# Altium PCB PCB.PcbDoc (part 1 of 2)
Units mm, origin at the board's own origin, x right, y up, seen from the top; angles counter-clockwise.
Board outline 40 x 90 mm, 4 copper layers (Top Layer, Int1 (GND), Int2, Bottom Layer (GND)), stack 0.77 mm thick; 131 components, 93 nets, 436 pads, 796 vias.
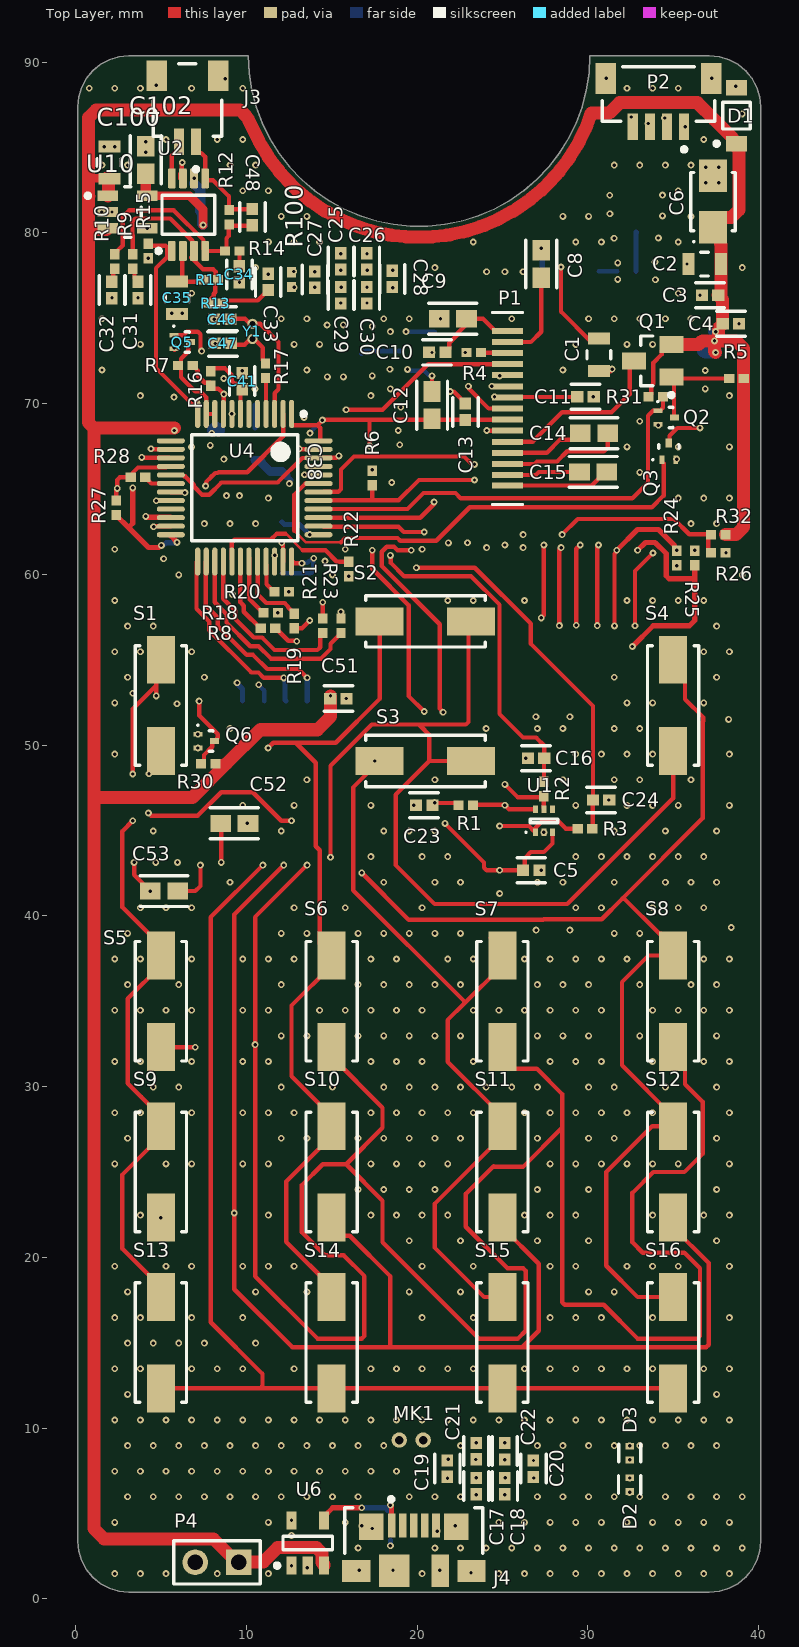
[diagram p0: Top Layer view]
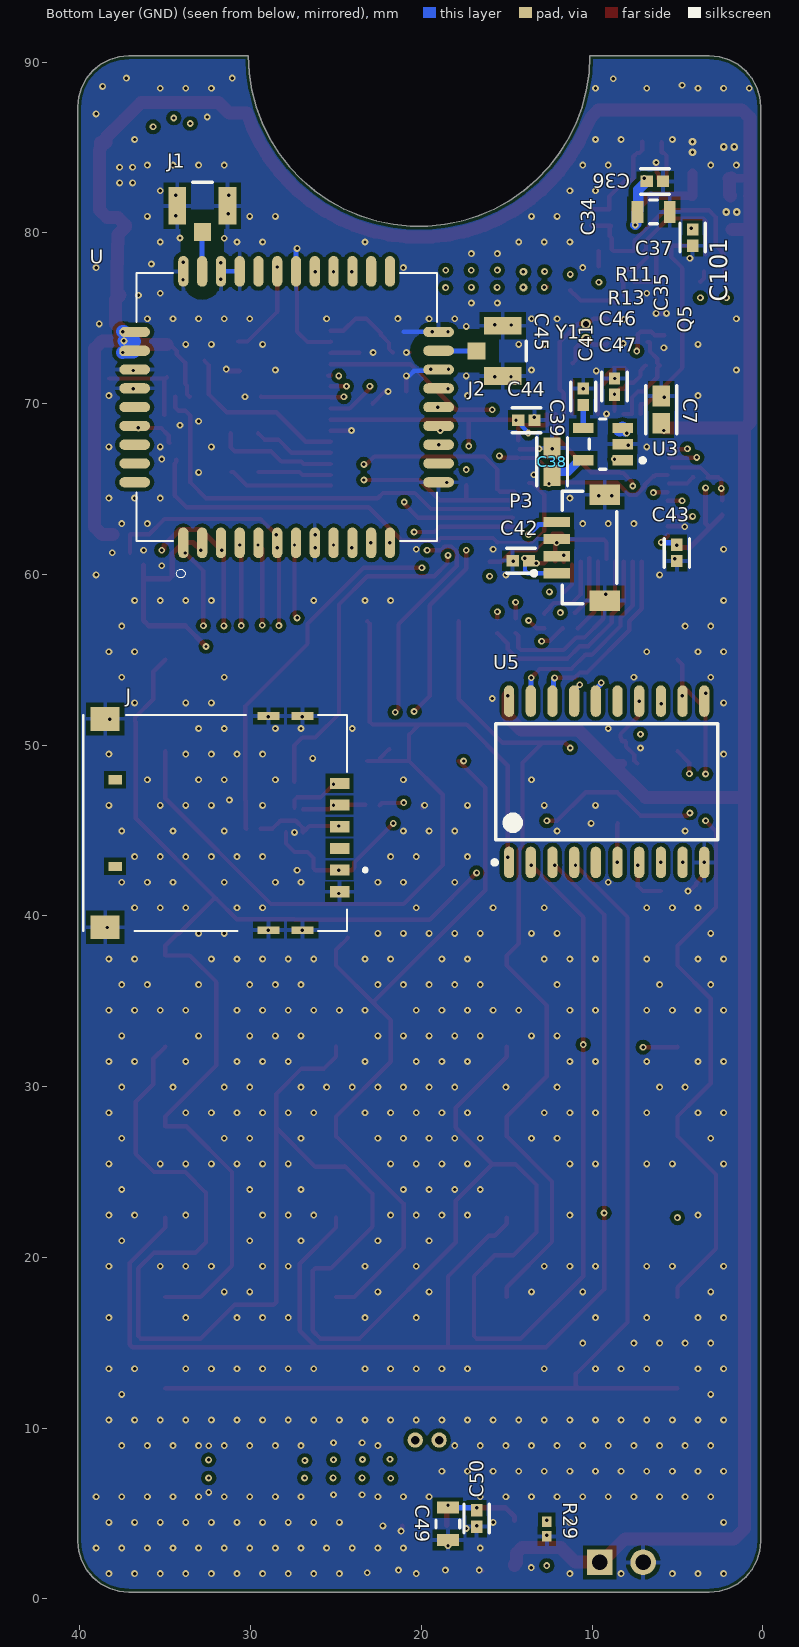
[diagram p1: Bottom Layer (GND) view, seen from below]
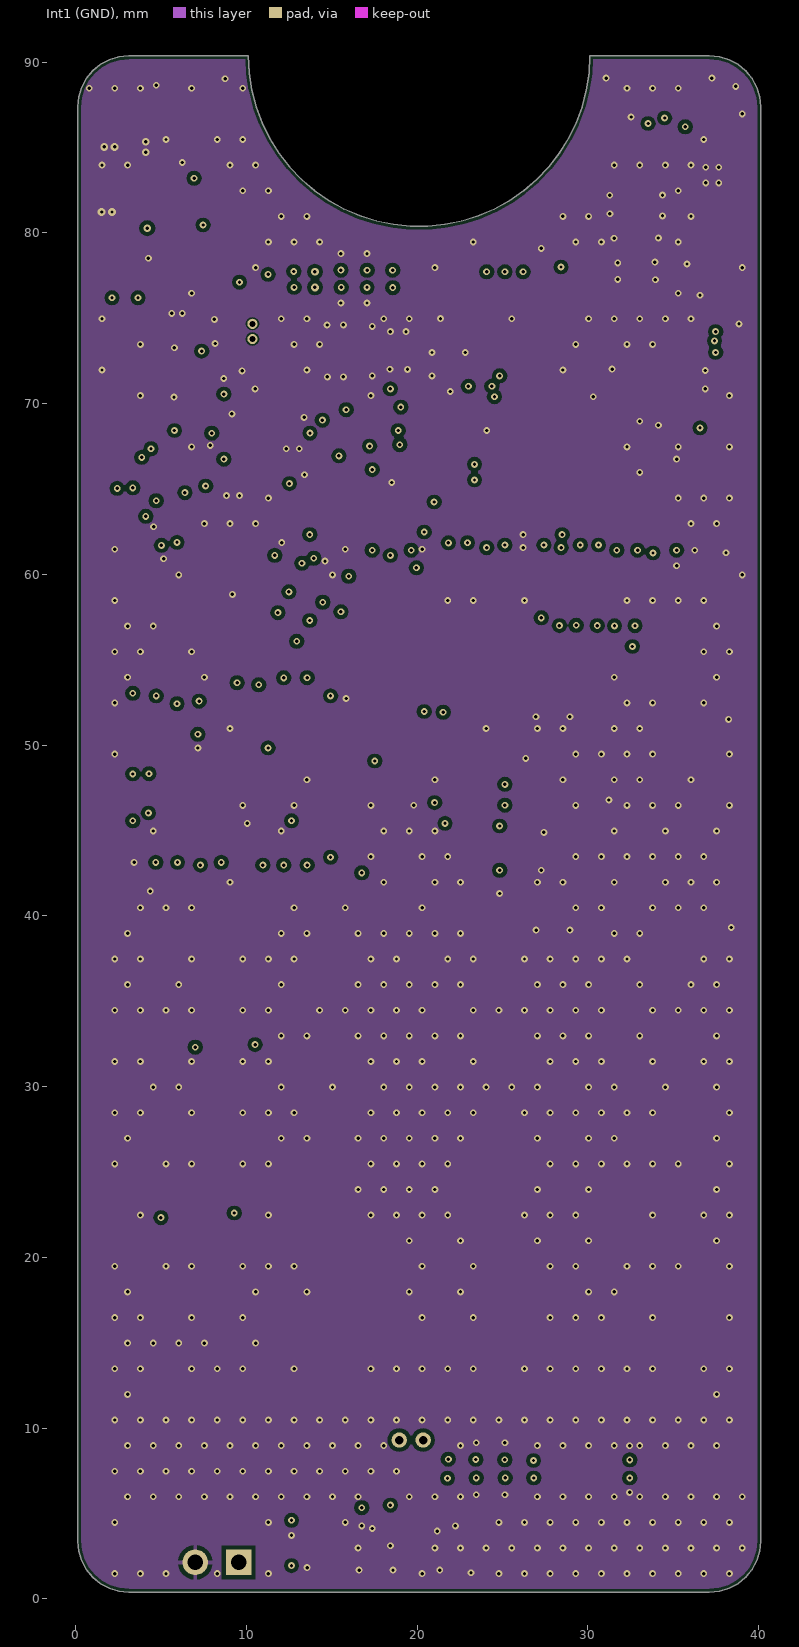
[diagram p2: Int1 (GND)]
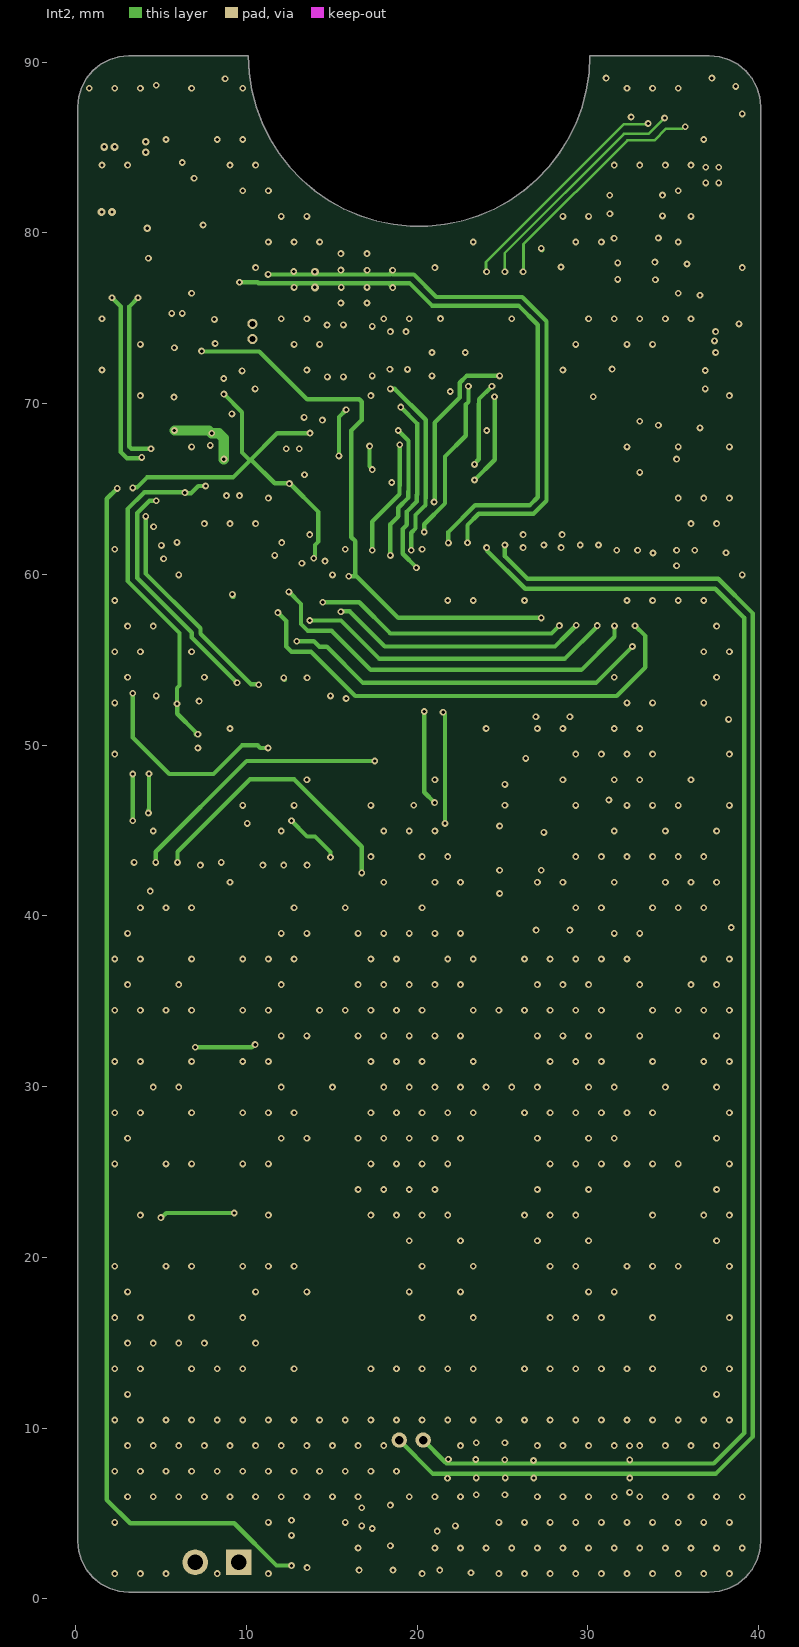
[diagram p3: Int2]
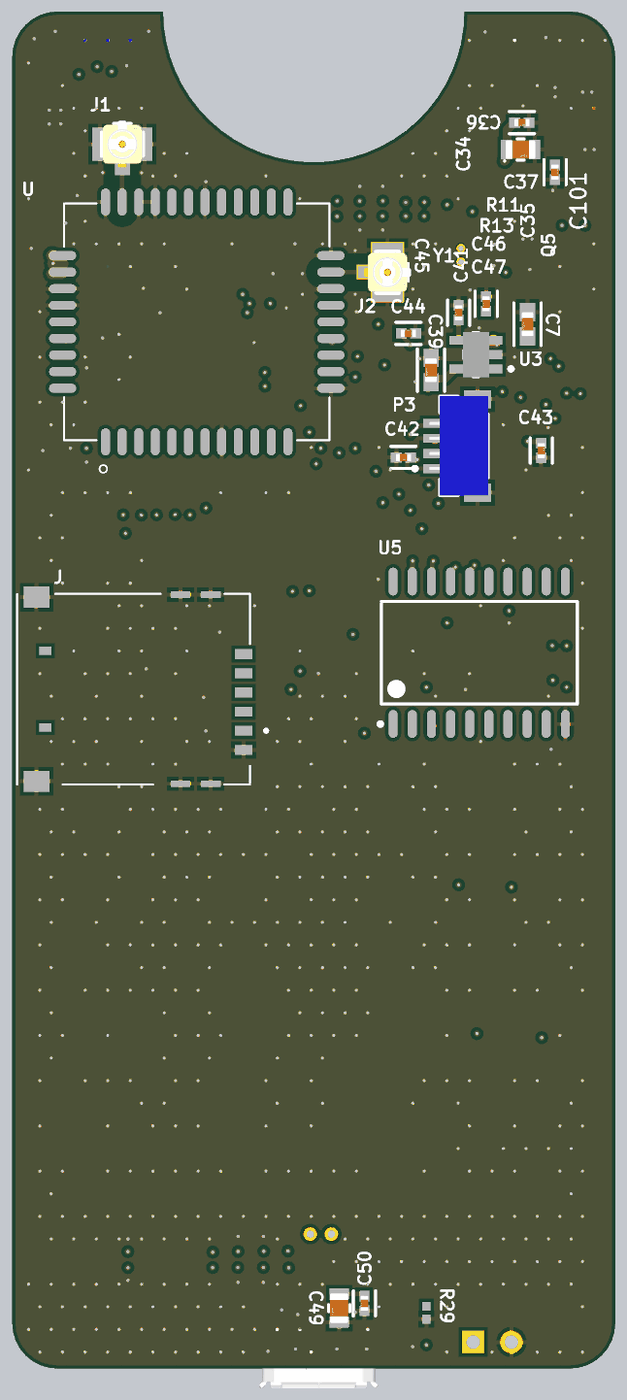
[diagram p5: 3D render of the assembled board from below, using the file's embedded part models]

## Layer stack, top to bottom
Top Solder: solder mask 0.013, SM-001, Dk 3.8
Top Layer: signal copper 0.035
Dielectric 1: prepreg 0.2, PP-022, Dk 4.6
Int1 (GND): signal copper 0.0175
Dielectric 3: core 0.265, Core-012, Dk 4.5
Int2: signal copper 0.0175
Dielectric 5: prepreg 0.2, PP-022, Dk 4.6
Bottom Layer (GND): signal copper 0.035
Bottom Solder: solder mask 0.013, SM-001, Dk 3.8

## Board outline
30.127,90.381 30.076,89.369 29.922,88.368 29.668,87.387 29.317,86.437 28.87,85.528 28.335,84.668 27.715,83.867 27.017,83.133 26.248,82.473 25.417,81.895 24.531,81.403 23.6,81.003 22.634,80.7 21.641,80.496 20.633,80.394 19.621,80.394 18.613,80.496 17.62,80.7 16.654,81.003 15.723,81.403 14.837,81.895 14.006,82.473 13.237,83.133 12.539,83.867 11.919,84.668 11.384,85.528 10.937,86.437 10.586,87.387 10.332,88.368 10.178,89.369 10.127,90.381 3.127,90.381 2.542,90.323 1.979,90.153 1.46,89.875 1.006,89.502 0.633,89.048 0.355,88.529 0.185,87.966 0.127,87.381 0.127,3.381 0.185,2.796 0.355,2.233 0.633,1.714 1.006,1.26 1.46,0.887 1.979,0.609 2.542,0.439 3.127,0.381 37.127,0.381 37.712,0.439 38.275,0.609 38.794,0.887 39.248,1.26 39.621,1.714 39.899,2.233 40.069,2.796 40.127,3.381 40.127,87.381 40.069,87.966 39.899,88.529 39.621,89.048 39.248,89.502 38.794,89.875 38.275,90.153 37.712,90.323 37.127,90.381

## Design rules (kind name [scope] priority, off if disabled: settings)
AssemblyTestPointUsage [All] p1: allowmultiple=TRUE
AssemblyTestpoint [All] p1: testpointundercomponent=TRUE minsize=0.635 maxsize=2.54 preferedsize=0.635 minholesize=0 maxholesize=1.016 preferedholesize=0.254 testpointgrid=0.025 usegrid=TRUE gridtolerance=0 allowsidetop=TRUE allowsidebottom=TRUE
BoardOutlineClearance [All] p1: gap=0.203 ignorepadtopadclearanceinfootprint=FALSE except(0: Arc-SplitContinuation Track-SplitContinuation SMDPad-SplitContinuation THPad-SplitContinuation Via-SplitContinuation Fill-SplitContinuation Poly-SplitContinuation Region-SplitContinuation Text-SplitContinuation)
Clearance Clearance_Keepout [Keepout] p1: gap=0.127 ignorepadtopadclearanceinfootprint=FALSE except(0: Arc-Fill Arc-Hole Track-Fill Track-Hole SMDPad-Fill SMDPad-Hole THPad-Fill THPad-Hole Via-Fill Via-Hole Fill-Fill Fill-Hole Poly-Hole Region-Hole Text-Hole)
Clearance Clearance_YT-26 [HasFootprint('YT-26')] p2: gap=0.076 ignorepadtopadclearanceinfootprint=FALSE except(0: Arc-Hole Track-Hole SMDPad-Hole THPad-Hole Via-Hole Fill-Hole Poly-Hole Region-Hole Text-Hole)
Clearance Clearance_RF [InNet('NetJ1_1')] p3: gap=0.254 ignorepadtopadclearanceinfootprint=FALSE except(0: Arc-Hole Track-Hole SMDPad-Hole THPad-Hole Via-Hole Fill-Hole Poly-Hole Region-Hole Text-Hole; 0.762: Arc-Fill Arc-Poly Arc-Region Track-Fill Track-Poly Track-Region SMDPad-Fill SMDPad-Poly SMDPad-Region THPad-Fill THPad-Poly THPad-Region Via-Fill Via-Poly Via-Region Fill-Fill Fill-Poly Fill-Region Poly-Poly Poly-Region Region-Region)
Clearance Clearance_RF_1 [InNet('NetJ2_1')] p4: gap=0.254 ignorepadtopadclearanceinfootprint=FALSE except(0: Arc-Hole Track-Hole SMDPad-Hole THPad-Hole Via-Hole Fill-Hole Poly-Hole Region-Hole Text-Hole; 0.762: Arc-Fill Arc-Poly Arc-Region Track-Fill Track-Poly Track-Region SMDPad-Fill SMDPad-Poly SMDPad-Region THPad-Fill THPad-Poly THPad-Region Via-Fill Via-Poly Via-Region Fill-Fill Fill-Poly Fill-Region Poly-Poly Poly-Region Region-Region)
Clearance Clearance_1 [All] p5: gap=0.229 ignorepadtopadclearanceinfootprint=FALSE except(0: Arc-Hole Track-Hole SMDPad-Hole THPad-Hole Via-Hole Fill-Hole Poly-Hole Region-Hole Text-Hole; 0.14: Arc-SMDPad Arc-THPad Arc-Via Arc-Text Track-SMDPad Track-THPad Track-Via Track-Text SMDPad-SMDPad SMDPad-THPad SMDPad-Via SMDPad-Text THPad-THPad THPad-Via THPad-Text Via-Via Via-Text Fill-Text Poly-Text Region-Text Text-Text)
FabricationTestPointUsage [All] p1: valid=0 allowmultiple=TRUE
FabricationTestpoint [All] p1: side=3 testpointundercomponent=TRUE minsize=0.635 maxsize=2.54 preferedsize=0.635 minholesize=0.196 maxholesize=1.016 preferedholesize=0.254 testpointgrid=0.025 allowsidetop=TRUE allowsidebottom=TRUE usegrid=TRUE gridtolerance=0
HoleSize [All] p1: absolutevalues=TRUE maxlimit=15.24 minlimit=0.196 maxpercent=80.000 minpercent=20.000
MinimumSolderMaskSliver [All] p1: minsoldermaskwidth=0.102
PlaneConnect PlaneConnect_1 [All] p1: planeconnectstyle=Relief reliefexpansion=0.508 reliefentries=4 reliefconductorwidth=0.254 reliefairgap=0.254
PlaneConnect PlaneConnect_via [IsVia] p2: planeconnectstyle=Direct reliefexpansion=0.508 reliefentries=4 reliefconductorwidth=0.254 reliefairgap=0.254
PolygonConnect PolygonConnect_via [IsVia] p1: connectstyle=Direct reliefconductorwidth=0.254 reliefentries=4 polygonreliefangle="90 Angle" airgapwidth=0.254
PolygonConnect [All] p2: connectstyle=Relief reliefconductorwidth=0.254 reliefentries=4 polygonreliefangle="90 Angle" airgapwidth=0.254
RoutingVias [All] p1: holewidth=0.2 width=0.4 viastyle="Through Hole" minholewidth=0.2 minwidth=0.4 maxholewidth=0.2 maxwidth=0.4
SilkToSilkClearance [All] p1: silktosilkclearance=0.025
SilkToSolderMaskClearance [IsPad] p1: minsilkscreentomaskgap=0 clearancetoexposedcopper=FALSE
SolderMaskExpansion SolderMaskExpansion_Via [IsVia] p1: expansion=0.051 istentingtop=TRUE
SolderMaskExpansion [All] p2: expansion=0.025 istentingtop=FALSE
UnRoutedNet [All] p1: checkbadconnections=TRUE
Width Width_power [InNet('VCC')] p1: maxlimit=1.27 minlimit=0.254 preferedwidth=0.762 minimp=50.000000 maximp=50.000000 favimp=50.000000
Width [All] p2: maxlimit=0.762 minlimit=0.152 preferedwidth=0.254 minimp=50.000000 maximp=50.000000 favimp=50.000000
20 further rules are at their usual default settings.

## Classes and differential pairs
component class phone: C1 C2 C3 C4 C5 C6 C16 C17 C18 C19 C20 C21 C22 C23 C24 C25 C26 C27 C28 C29 C30 C31 C32 C33 C34 C35 C36 C37 C48 C100 C101 C102 D1 D2 D3 J J1 J2 J3 MK1 P2 Q3 R1 R2 R3 R9 R10 R11 R12 R13 R14 R15 R32 R100 U U1 U2 U10
component class main: C7 C38 C39 C41 C42 C43 C44 C45 C46 C47 C49 C50 J4 P3 P4 Q5 R7 R8 R16 R17 R18 R19 R20 R21 R22 R23 R24 R25 R26 R27 R28 R29 U3 U4 U6 Y1
component class lcd: C8 C9 C10 C11 C12 C13 C14 C15 P1 Q1 Q2 R4 R5 R6 R31
component class keypad: C51 C52 C53 Q6 R30 S1 S2 S3 S4 S5 S6 S7 S8 S9 S10 S11 S12 S13 S14 S15 S16 U5

## Components (designator, comment, footprint, x,y, rotation, side; value= is the part's Value field where it differs from the comment)
C1 "22uF" FP-GRM21B-0_15-MFG#1 30.656,72.867 r270 top
C2 "22uF" FP-GRM21B-0_15-MFG#1 36.845,78.181 r180 top
C3 "33pf" FP-GRM155-0_05-IPC_A#1 37.164,76.352 r0 top
C4 "10pf" FP-GRM155-0_05-IPC_A#1 38.383,74.676 r180 top
C5 "100n" FP-GRM155-0_05-IPC_A#1 26.691,42.672 r0 top
C6 "Capacitor" CAPMP3525X20N 37.338,81.839 r90 top value="100uF TANT"
C7 "4.7uF" FP-GRM188-0_1-e0_2_0_55-IPC_A#1 5.944,69.647 r270 bottom
C8 "2.2uF/16V" FP-GRM188-0_1-e0_2_0_55-IPC_A#1 27.28,78.181 r90 top
C9 "4.7uF/16V" FP-GRM188-0_1-e0_2_0_55-IPC_A#1 22.098,74.981 r0 top
C10 "100n" FP-GRM155-0_05-IPC_A#1 21.184,73 r0 top
C11 "100n" FP-GRM155-0_05-IPC_A#1 29.87,70.409 r180 top
C12 "4.7uF" FP-GRM188-0_1-e0_2_0_55-IPC_A#1 20.879,69.912 r270 top
C13 "100n" FP-GRM155-0_05-IPC_A#1 22.839,69.525 r270 top
C14 "1uF/16V" FP-GRM188-0_1-e0_2_0_55-IPC_A#1 30.367,68.275 r180 top
C15 "1uF/16V" FP-GRM188-0_1-e0_2_0_55-IPC_A#1 30.318,66 r180 top
C16 "33p" FP-GRM155-0_05-IPC_A#1 26.975,49.225 r0 top
C17 "10p" FP-GRM155-0_05-IPC_A#1 23.466,6.598 r270 top
C18 "33p" FP-GRM155-0_05-IPC_A#1 25.149,6.6 r270 top
C19 "10p" FP-GRM155-0_05-IPC_A#1 21.78,7.626 r270 top
C20 "33p" FP-GRM155-0_05-IPC_A#1 26.822,7.62 r270 top
C21 "10p" FP-GRM155-0_05-IPC_A#1 23.47,8.65 r270 top
C22 "33p" FP-GRM155-0_05-IPC_A#1 25.146,8.644 r270 top
C23 "33p" FP-GRM155-0_05-IPC_A#1 20.422,46.482 r180 top
C24 "33p" FP-GRM155-0_05-IPC_A#1 30.785,46.787 r180 top
C25 "10p" FP-GRM155-0_05-IPC_A#1 15.545,78.334 r90 top
C26 "33p" FP-GRM155-0_05-IPC_A#1 17.069,78.334 r90 top
C27 "10p" FP-GRM155-0_05-IPC_A#1 14.021,77.267 r90 top
C28 "33p" FP-GRM155-0_05-IPC_A#1 18.557,77.313 r90 top
C29 "10p" FP-GRM155-0_05-IPC_A#1 15.545,76.352 r90 top
C30 "33p" FP-GRM155-0_05-IPC_A#1 17.069,76.352 r90 top
C31 "390n" FP-GRM155-0_05-IPC_A#1 3.658,76.657 r90 top
C32 "390n" FP-GRM155-0_05-IPC_A#1 2.134,76.657 r90 top
C33 "390n" FP-GRM155-0_05-IPC_A#1 11.278,77.136 r270 top
C34 "390n" FP-GRM155-0_05-IPC_A#1 9.601,77.572 r90 top
C35 "22uF" FP-GRM21B-0_15-MFG#1 5.944,76.2 r270 top
C36 "100n" FP-GRM155-0_05-IPC_A#1 6.316,83.015 r180 bottom
C37 "22uF" FP-GRM21B-0_15-MFG#1 6.401,81.229 r180 bottom
C38 "4.7uF" FP-GRM188-0_1-e0_2_0_55-IPC_A#2 12.344,66.599 r270 bottom
C39 "10n" FP-GRM155-0_05-IPC_A#2 10.516,70.409 r270 bottom
C41 "100n" FP-GRM155-0_05-IPC_A#2 9.754,71.323 r270 top
C42 "100n" FP-GRM155-0_05-IPC_A#2 14.173,60.808 r180 bottom
C43 "100n" FP-GRM155-0_05-IPC_A#2 5.029,61.265 r90 bottom
C44 "100n" FP-GRM155-0_05-IPC_A#2 13.847,69.037 r0 bottom
C45 "100n" FP-GRM155-0_05-IPC_A#2 8.687,70.997 r270 bottom
C46 "20p" FP-GRM155-0_05-IPC_A#1 8.587,74.94 r180 top
C47 "20p" FP-GRM155-0_05-IPC_A#1 8.629,73.526 r180 top
C48 "100pF" FP-GRM155-0_05-IPC_A#1 10.363,80.924 r90 top
C49 "22uF" FP-GRM21B-0_15-MFG#2 18.44,4.384 r270 bottom
C50 "100n" FP-GRM155-0_05-IPC_A#2 16.764,4.703 r270 bottom
C51 "100n" FP-GRM155-0_05-IPC_A#1 15.392,52.73 r180 top
C52 "100n" FP-GRM188-0_1-e0_2_0_55-IPC_A#1 9.296,45.415 r0 top
C53 "1uF" FP-GRM188-0_1-e0_2_0_55-IPC_A#1 5.182,41.453 r180 top
C100 "22uF" FP-GRM21B-0_15-MFG#1 1.981,84.125 r90 top
C101 "10n" FP-GRM155-0_05-IPC_A#1 4.115,79.727 r90 bottom
C102 "4.7uF" FP-GRM188-0_1-e0_2_0_55-IPC_A#1 4.115,84.277 r270 top
D1 "MMSZ5231BT1G" ONSC-SOD-123-2-425-04_V 38.71,86.868 r90 top
D2 "LXES15AAA1-153" FP-LXES15-MFG 32.454,6.692 r90 top
D3 "LXES15AAA1-153" FP-LXES15-MFG 32.461,8.534 r270 top
J "78646-3001" MOLEX_78646-3001 32.081,45.437 r0 bottom locked
J1 "U.FL-R-SMT-1(10)" FP-U_FL-R-SMT-1_10-MFG#1 32.824,81.586 r0 bottom
J2 "U.FL-R-SMT-1(10)" FP-U_FL-R-SMT-1_10-MFG#2 15.233,73.09 r90 bottom
J3 "SM02B-SRSS-TB(LF)(SN)" FP-SM02B-SRSS-TB_LF_SN-0 6.553,87.782 r180 top
J4 "473460001" FP-473460001-MFG 19.812,1.981 r0 top
MK1 "Mic1" 4015 19.66,9.296 r0 top
P1 "Header 15" FLEX_CONN 24.398,69.718 r0 top
P2 "SM04B-SSR-H-TB(LF)(SN)" JST-SM04B-SSR-H-TB_V 34.143,87.63 r180 top
P3 "SM04B-SSR-H-TB(LF)(SN)" JST-SM04B-SSR-H-TB_V 10.668,61.57 r90 bottom
P4 "BAT" HDR1X2 9.55,2.134 r180 top
Q1 "FDN338P" FAIR-SSOT3L-3_V 33.8,72.507 r180 top
Q2 "DTC114EM3T5G" ONSC-SOT-723-3-631AA-01_V 34.595,69.19 r0 top
Q3 "DTC114EM3T5G" ONSC-SOT-723-3-631AA-01_V 34.747,67.208 r90 top
Q5 "DTC114EM3T5G" ONSC-SOT-723-3-631AA-01_V 6.248,73.609 r0 top
Q6 "DTC114EM3T5G" ONSC-SOT-723-3-631AA-01_V 7.653,50.235 r0 top
R1 "22R" RESC1005X40X25NL05T10 22.86,46.482 r180 top
R2 "22R" RESC1005X40X25NL05T10 27.432,47.429 r270 top
R3 "22R" RESC1005X40X25NL05T10 29.838,45.11 r180 top
R4 "560k" RESC1005X40X25NL05T10 23.317,73 r180 top
R5 "47k" RESC1005X40X25NL05T10 38.71,71.476 r180 top
R6 "10k" RESC1005X40X25NL05T10 17.374,65.652 r270 top
R7 "47k" RESC1005X40X25NL05T10 6.433,72.238 r0 top
R8 "1k" RESC1005X40X25NL05T10 11.278,56.845 r180 top
R9 "20k" RESC1005X40X25NL05T10 3.353,78.334 r90 top
R10 "20k" RESC1005X40X25NL05T10 2.286,78.334 r90 top
R11 "20k" RESC1005X40X25NL05T10 7.925,77.267 r0 top
R12 "10k" RESC1005X40X25NL05T10 8.992,80.924 r90 top
R13 "20k" RESC1005X40X25NL05T10 8.197,75.895 r180 top
R14 "20k" RESC1005X40X25NL05T10 9.176,78.943 r180 top
R15 "20k" RESC1005X40X25NL05T10 4.267,78.943 r90 top
R16 "1k" RESC1005X40X25NL05T10 7.925,71.476 r90 top
R17 "220R" RESC1005X40X25NL05T10 11.125,71.933 r270 top
R18 "1k" RESC1005X40X25NL05T10 11.43,57.76 r180 top
R19 "1k" RESC1005X40X25NL05T10 12.802,57.27 r90 top
R20 "1k" RESC1005X40X25NL05T10 12.072,58.979 r180 top
R21 "1k" RESC1005X40X25NL05T10 14.478,56.998 r90 top
R22 "1k" RESC1005X40X25NL05T10 16.002,60.318 r270 top
R23 "1k" RESC1005X40X25NL05T10 15.545,56.998 r270 top
R24 "5.6k" RESC1005X40X25NL05T10 35.204,60.96 r270 top
R25 "5.6k" RESC1005X40X25NL05T10 36.271,60.96 r90 top
R26 "5.6k" RESC1005X40X25NL05T10 37.643,61.265 r0 top
R27 "800k" RESC1005X40X25NL05T10 2.382,63.902 r270 top
R28 "2k" RESC1005X40X25NL05T10 3.658,65.684 r0 top
R29 "1.65k" RESC1005X40X25NL05T10 12.649,4.083 r270 bottom
R30 "47k" RESC1005X40X25NL05T10 7.772,48.92 r0 top
R31 "10k" RESC1005X40X25NL05T10 33.985,70.409 r180 top
R32 "20k" RESC1005X40X25NL05T10 37.643,62.332 r180 top
R100 "33R" RESC1005X40X25NL05T10 12.649,77.267 r90 top
S1 "PWR" 3-6-2.5 5,52.325 r90 top
S2 "PWR" 3-6-2.5 20.486,57.249 r180 top
S3 "PWR" 3-6-2.5 20.486,49.069 r180 top
S4 "PWR" 3-6-2.5 35,52.325 r90 top
S5 "PWR" 3-6-2.5 5,35 r90 top
S6 "PWR" 3-6-2.5 15,35 r90 top
S7 "PWR" 3-6-2.5 25,35 r90 top
S8 "PWR" 3-6-2.5 35,35 r90 top
S9 "PWR" 3-6-2.5 5,25 r90 top
S10 "PWR" 3-6-2.5 15,25 r90 top
S11 "PWR" 3-6-2.5 25,25 r90 top
S12 "PWR" 3-6-2.5 35,25 r90 top
S13 "PWR" 3-6-2.5 5,15 r90 top
S14 "PWR" 3-6-2.5 15,15 r90 top
S15 "PWR" 3-6-2.5 25,15 r90 top
S16 "PWR" 3-6-2.5 35,15 r90 top
U "SIM800C" LCC110P1570X1760X250-42N-NEW 27.889,69.799 r90 bottom locked
U1 "NUP5120X6T1G" ONSC-SOT-563-6-463A-01_V 27.432,45.568 r90 top
U2 "LM4889MM/NOPB" DGK0008A_L 6.614,81.068 r90 top
U3 "LD3985M33R" FP-SOT23-5L-7049676-MFG#1 9.366,67.63 r0 bottom
U4 "STM32L151C8T6A" STM-LQFP48_M 9.906,65.075 r270 top locked
U5 "XL74C922" XL74C922 9.144,47.854 r90 bottom
U6 "BL4054B" BL4054B 13.601,3.27 r90 top
U10 "LD3985M33R" FP-SOT23-5L-7049676-MFG#2 3.048,81.229 r0 top
Y1 "32khz 12.5pF" YT-26 10.363,73.787 r0 top

## Footprints (in the part's own frame and the unit in brackets; to place one, negate y for a bottom-side part, rotate by r counter-clockwise, add the part's x,y. Pads: shape width x height; smd on the part's side, far side on the other; paste and mask are expansions set on the pad)
3-6-2.5 [mm] "Molded Capacitor, 2-Leads, Body 7.00x3.00mm, IPC Medium Density"
  rect 2.8x1.65 smd: 1(-2.675,0) 2(2.675,0)
  silkscreen extent -3.5,-1.5 3.5,1.5, body extent -3.5,-1.5 3.5,1.5, height 2.5
4015 [mm]
  round 0.9 hole 0.5: 1(-0.7,0) 2(0.7,0)
BL4054B [mm]
  rect 1.05x0.6 smd: 1(-1.325,0.95) 2(-1.325,0) 3(-1.325,-0.95) 4(1.325,-0.95) 5(1.325,0.95)
  silkscreen extent -1.45,-1.45 0.4,1.92, body extent -0.8,-1.45 0.8,1.45, height 0.95
CAPMP3525X20N [mm] "Molded Capacitor, 2-Leads, Body 3.50x2.50mm, IPC Medium Density"
  rect 1.9x1.65 smd: 1(-1.5,0) 2(1.5,0)
  silkscreen extent -2.4,-1.3 1.7,1.3, body extent -1.7,-1.3 1.7,1.3, height 2
DGK0008A_L [mm] "TSOP, 8-Leads, Body 3.1x3.1mm, Pitch 0.65mm, IPC High Density"
  rrect22% 1.15x0.45 smd: 1(-2.125,0.975) 2(-2.125,0.325) 3(-2.125,-0.325) 4(-2.125,-0.975) 5(2.125,-0.975) 6(2.125,-0.325) 7(2.125,0.325) 8(2.125,0.975)
  silkscreen extent -2.25,-1.55 1.15,1.87, body extent -2.45,-1.5 2.45,1.5, height 0.94
FAIR-SSOT3L-3_V [mm] "SOT23, 3-Leads, Body 2.92x1.4mm, Pitch 0.95mm"
  rect 1.4x1 smd: 1(-1.1,0.95) 2(-1.1,-0.95) 3(1.1,0)
  silkscreen extent -1.23,-1.46 0.7,2.12, body extent -1.26,-1.46 1.26,1.46, height 1.12
FLEX_CONN [mm]
  rect 1.8x0.35 smd: 1(0.896,-4.51) 2(0.9,-3.9) 3(0.9,-3.25) 4(0.9,-2.6) 5(0.9,-1.95) 6(0.9,-1.3) 7(0.9,-0.65) 8(0.9,0) 9(0.9,0.65) 10(0.9,1.3) 11(0.9,1.95) 12(0.9,2.6) 13(0.9,3.25) 14(0.9,3.9) 15(0.9,4.55)
  silkscreen extent 0,-5.63 1.8,5.63
FP-473460001-MFG [mm]
  rect 0.45x1.38 smd paste+0 mask+0: 1(-1.3,2.31) 2(-0.65,2.31) 3(0,2.31) 4(0.65,2.31) 5(1.3,2.31)
  rect 1.425x1.55 smd paste+0 mask+0: 6(-2.488,2.225) 7(2.488,2.225)
  rect 1.65x1.3 smd paste+0 mask+0: 8(-3.375,-0.35) 11(3.375,-0.35)
  rect 1.8x1.9 smd paste+0 mask+0: 9(-1.15,-0.35)
  rect 1x1.9 smd paste+0 mask+0: 10(1.55,-0.35)
  silkscreen extent -4.05,0.67 4.05,3.97, body extent -3.99,-2.93 3.99,2.5, height 2.98
FP-GRM21B-0_15-MFG#1 [mm]
  rect 0.7x1.3 smd paste+0 mask+0: 1(-0.95,0) 2(0.95,0)
  silkscreen extent -0.23,-0.7 0.23,0.7, body extent -1.4,-0.8 1.4,0.8, height 0.25
FP-GRM21B-0_15-MFG#2 [mm]
  rect 0.7x1.3 smd: 1(-0.95,0) 2(0.95,0)
  silkscreen extent -0.23,-0.7 0.23,0.7, body extent -1,-0.63 1,0.62, height 1.4
FP-GRM155-0_05-IPC_A#1 [mm]
  rect 0.715x0.672 smd paste+0 mask+0: 1(-0.479,0) 2(0.479,0)
  silkscreen extent -0.84,-0.74 0.84,0.74, body extent -1.04,-0.54 1.04,0.54, height 0.25
FP-GRM155-0_05-IPC_A#2 [mm]
  rect 0.715x0.672 smd: 1(-0.479,0) 2(0.479,0)
  silkscreen extent -0.84,-0.74 0.84,0.74, body extent -0.5,-0.25 0.5,0.25, height 0.55
FP-GRM188-0_1-e0_2_0_55-IPC_A#1 [mm]
  rect 1.208x1.012 smd paste+0 mask+0: 1(-0.802,0) 2(0.802,0)
  silkscreen extent -1.41,-0.91 1.41,0.91, body extent -0.8,-0.4 0.8,0.4, height 0.9
FP-GRM188-0_1-e0_2_0_55-IPC_A#2 [mm]
  rect 1.208x1.012 smd: 1(-0.802,0) 2(0.802,0)
  silkscreen extent -1.41,-0.91 1.41,0.91, body extent -0.8,-0.4 0.8,0.4, height 0.9
FP-LXES15-MFG [mm]
  rect 0.4x0.5 smd paste+0 mask+0: 1(-0.4,0) 2(0.4,0)
  silkscreen extent -0.53,-0.65 0.53,0.65, body extent -0.7,-0.38 0.7,0.38, height 0.25
FP-SM02B-SRSS-TB_LF_SN-0 [mm]
  rect 0.6x1.55 smd: 1(-0.5,2.45) 2(0.5,2.45)
  rect 1.2x1.8 smd: 3(-1.8,-1.425) 4(1.8,-1.425)
  silkscreen extent -2,-2.12 2,4.17, body extent -2,-2.12 2,2.82, height 2.9
FP-SOT23-5L-7049676-MFG#1 [mm]
  rect 1.2x0.6 smd: 1(-1.15,0.95) 2(-1.15,0) 3(-1.15,-0.95) 4(1.15,-0.95) 5(1.15,0.95)
  silkscreen extent -2.45,-1.48 0.8,1.47, body extent -0.87,-1.5 0.88,1.5, height 1.45
FP-SOT23-5L-7049676-MFG#2 [mm]
  rect 1.2x0.6 smd paste+0 mask+0: 1(-1.15,0.95) 2(-1.15,0) 3(-1.15,-0.95) 4(1.15,-0.95) 5(1.15,0.95)
  silkscreen extent -2.45,-1.48 0.8,1.47, body extent -1.85,-1.58 1.85,1.57, height 0.25
FP-U_FL-R-SMT-1_10-MFG#1 [mm]
  rect 1x1.05 smd: 1(0,1.525)
  rect 1.05x2.2 smd: 2(-1.475,0) 3(1.475,0)
  silkscreen extent -0.58,-1.38 0.58,-1.38, body extent -1.5,-1.55 1.5,1.55, height 1.45
FP-U_FL-R-SMT-1_10-MFG#2 [mm]
  rect 1x1.05 smd paste-1000 mask+0: 1(0,1.525)
  rect 1.05x2.2 smd paste-1000 mask+0: 2(-1.475,0) 3(1.475,0)
  silkscreen extent -0.58,-1.38 0.58,-1.38, body extent -1.5,-1.55 1.5,1.55, height 1.45
HDR1X2 [mm] "Connector; Header; 2 Position"
  rect 1.5x1.5 hole 0.9: 1(0,0)
  round 1.5 hole 0.9: 2(2.54,0)
  silkscreen extent -1.27,-1.27 3.81,1.27
JST-SM04B-SSR-H-TB_V [mm] "SMD, 4-Leads, Body 6.6x3.2mm, Pitch 1mm"
  rect 0.6x1.55 smd: 1(-1.5,1.413) 2(-0.5,1.413) 3(0.5,1.413) 4(1.5,1.413)
  rect 1.2x1.8 smd: MP1(-3.1,-1.412) MP2(3.1,-1.412)
  silkscreen extent -3.3,-2.11 3.3,2.86, body extent -3.3,-2.11 3.3,1.79, height 2.01
LCC110P1570X1760X250-42N-NEW [mm]
  oval 1.8x0.6 smd: 1(-7.95,6.05) 2(-7.95,4.95) 3(-7.95,3.85) 4(-7.95,2.75) 5(-7.95,1.65) 6(-7.95,0.55) 7(-7.95,-0.55) 8(-7.95,-1.65) 9(-7.95,-2.75) 10(-7.95,-3.85) 11(-7.95,-4.95) 12(-7.95,-6.05) 22(7.95,-6.05) 23(7.95,-4.95) 24(7.95,-3.85) 25(7.95,-2.75) 26(7.95,-1.65) 27(7.95,-0.55) 28(7.95,0.55) 29(7.95,1.65) 30(7.95,2.75) 31(7.95,3.85) 32(7.95,4.95) 33(7.95,6.05)
  oval 0.6x1.8 smd: 13(-4.4,-8.9) 14(-3.3,-8.9) 15(-2.2,-8.9) 16(-1.1,-8.9) 17(0,-8.9) 18(1.1,-8.9) 19(2.2,-8.9) 20(3.3,-8.9) 21(4.4,-8.9) 34(4.4,8.9) 35(3.3,8.9) 36(2.2,8.9) 37(1.1,8.9) 38(0,8.9) 39(-1.1,8.9) 40(-2.2,8.9) 41(-3.3,8.9) 42(-4.4,8.9)
  silkscreen extent -10,-8.8 7.85,8.8
MOLEX_78646-3001 [mm]
  rect 1.15x0.65 smd: C1(-7.295,2.755) C2(-7.295,0.215) C3(-7.295,-2.325) C5(-7.295,4.025) C6(-7.295,1.485) C7(-7.295,-1.055)
  rect 1.3x0.45 smd: G1(-5.125,6.27) G2(-3.125,6.27) G3(-5.125,-6.27) G4(-3.125,-6.27)
  rect 1.7x1.4 smd: G5(6.435,-6.105) G6(6.435,6.105)
  rect 0.8x0.54 smd: X1(5.855,2.54) X2(5.855,-2.54)
  silkscreen extent -8.89,-6.32 7.73,6.32
ONSC-SOD-123-2-425-04_V [mm] "SOD, 2-Leads, Body 2.69x1.6mm"
  rect 0.91x1.22 smd: 1(-1.635,0) 2(1.635,0)
  silkscreen extent -1.76,-0.8 0.78,1.28, body extent -1.35,-0.8 1.35,0.8, height 1.35
ONSC-SOT-563-6-463A-01_V [mm] "SOT23, 6-Leads, Body 1.6x1.2mm, Pitch 0.5mm"
  rect 0.45x0.3 smd: 1(-0.675,0.5) 2(-0.675,0) 3(-0.675,-0.5) 4(0.675,-0.5) 5(0.675,0) 6(0.675,0.5)
  silkscreen extent -0.72,-0.8 0.1,1.1, body extent -0.6,-0.8 0.6,0.8, height 0.6
ONSC-SOT-723-3-631AA-01_V [mm] "SOT223, 3-Leads, Body 1.2x0.8mm, Pitch 0.4mm"
  rect 0.52x0.27 smd: 1(-0.49,0.4) 2(-0.49,-0.4)
  rect 0.52x0.36 smd: 3(0.49,0)
  silkscreen extent -0.54,-0.6 0.4,0.98, body extent -0.4,-0.6 0.4,0.6, height 0.55
RESC1005X40X25NL05T10 [mm] "Chip Resistor, 2-Leads, Body 1.00x0.50mm, IPC Medium Density"
  rect 0.6x0.55 smd: 1(-0.425,0) 2(0.425,0)
  body extent -0.53,-0.27 0.53,0.28, height 0.4
STM-LQFP48_M [mm] "QFP, 48-Leads, Body 7x7mm, Pitch 0.5mm, IPC Low Density"
  oval 1.65x0.3 smd: 1(-4.325,2.75) 2(-4.325,2.25) 3(-4.325,1.75) 4(-4.325,1.25) 5(-4.325,0.75) 6(-4.325,0.25) 7(-4.325,-0.25) 8(-4.325,-0.75) 9(-4.325,-1.25) 10(-4.325,-1.75) 11(-4.325,-2.25) 12(-4.325,-2.75) 25(4.325,-2.75) 26(4.325,-2.25) 27(4.325,-1.75) 28(4.325,-1.25) 29(4.325,-0.75) 30(4.325,-0.25) 31(4.325,0.25) 32(4.325,0.75) 33(4.325,1.25) 34(4.325,1.75) 35(4.325,2.25) 36(4.325,2.75)
  oval 0.3x1.65 smd: 13(-2.75,-4.325) 14(-2.25,-4.325) 15(-1.75,-4.325) 16(-1.25,-4.325) 17(-0.75,-4.325) 18(-0.25,-4.325) 19(0.25,-4.325) 20(0.75,-4.325) 21(1.25,-4.325) 22(1.75,-4.325) 23(2.25,-4.325) 24(2.75,-4.325) 37(2.75,4.325) 38(2.25,4.325) 39(1.75,4.325) 40(1.25,4.325) 41(0.75,4.325) 42(0.25,4.325) 43(-0.25,4.325) 44(-0.75,4.325) 45(-1.25,4.325) 46(-1.75,4.325) 47(-2.25,4.325) 48(-2.75,4.325)
  silkscreen extent -4.45,-3.1 3.1,3.58, body extent -3.5,-3.5 3.5,3.5, height 1.6
XL74C922 [mm]
  oval 1.85x0.6 smd: 1(-4.725,5.715) 2(-4.725,4.445) 3(-4.725,3.175) 4(-4.725,1.905) 5(-4.725,0.635) 6(-4.725,-0.635) 7(-4.725,-1.905) 8(-4.725,-3.175) 9(-4.725,-4.445) 10(-4.725,-5.715) 11(4.725,-5.715) 12(4.725,-4.445) 13(4.725,-3.175) 14(4.725,-1.905) 15(4.725,-0.635) 16(4.725,0.635) 17(4.725,1.905) 18(4.725,3.175) 19(4.725,4.445) 20(4.725,5.715)
  silkscreen extent -4.85,-6.5 3.4,6.69, body extent -3.8,-6.5 3.8,6.5, height 2.5
YT-26 [mm]
  round 0.6 hole 0.35: 1(0,0) 2(0,0.889)

## Part data
C1 C2 C35 C37 C49 C100: library part CMP-2007-03385-2, "Chip Multilayer Ceramic Capacitors for General Purpose, 0805, 22uF, X5R, 15%, 20%, 6.3V", Case Code (Imperial)=0805, Case Code (Metric)=2012, Dielectric=X5R, Max Operating Temperature=85°C, Min Operating Temperature=-55°C, Package Quantity=1, Tolerance=20%, Voltage=6.3V, Capacitance=22uF, Case/Package=0805, Depth=1.25mm, Height=1.25mm, Lead Free="Lead Free", Length=2mm, Material=Ceramic, Mount="Surface Mount", Packaging="Tape and Reel", Radiation Hardening=No, REACH SVHC="No SVHC", Termination=SMD/SMT, Thickness=0.053inch, Voltage Rating=6.3V, Voltage Rating (DC)=6.3V, Width=0.049inch
C3 C4 C5 C10 C11 C13 C16 C17 C18 C19 C20 C21 C22 C23 C24 C25 C26 C27 C28 C29 C30 C31 C32 C33 C34 C36 C39 C41 C42 C43 C44 C45 C46 C47 C48 C50 C51 C101: library part CMP-2008-04369-2, "Chip Multilayer Ceramic Capacitors for General Purpose, 0402, 470pF, C0G, 30ppm/°C, 5%, 50V", Capacitance=470pF, Case Code (Imperial)=0402, Case Code (Metric)=1005, Dielectric=C0G, Dielectric Material=Ceramic, Insulation Resistance=10GR, Max Operating Temperature=125°C, Min Operating Temperature=-55°C, Package Quantity=1, Temperature Coefficient=30ppm/°C, Tolerance=5%, Voltage=50V, Case/Package=0402, Depth=0.5mm, Height=0.5mm, Lead Free="Lead Free", Length=1mm, Material=Ceramic, Mount="Surface Mount", Number of Pins=2, Packaging="Tape and Reel", Radiation Hardening=No, REACH SVHC="No SVHC", Termination=SMD/SMT, Thickness=0.022inch, Voltage Rating=50V, Voltage Rating (DC)=50V, Width=0.5mm
C7 C8 C9 C12 C14 C15 C38 C52 C53 C102: library part CMP-2006-02792-2, "Chip Multilayer Ceramic Capacitors for General Purpose, 0603, 10uF, X5R, 15%, 20%, 6.3V", Capacitance=10uF, Case Code (Imperial)=0603, Case Code (Metric)=1608, Dielectric=X5R, Max Operating Temperature=85°C, Min Operating Temperature=-55°C, Package Quantity=4000, Tolerance=20%, Voltage=6.3V, Case/Package=0603, Depth=0.8mm, Height=0.8mm, Lead Free="Lead Free", Length=1.6mm, Material=Ceramic, Mount="Surface Mount", Packaging="Tape and Reel", Radiation Hardening=No, REACH SVHC="No SVHC", Termination=SMD/SMT, Thickness=0.035inch, Voltage Rating=6.3V, Voltage Rating (DC)=6.3V, Width=0.031inch
D1: library part CMP-1060-00573-1, "Zener Voltage Regulator, 500 mW, 2-Pin SOD-123, Pb-Free, Tape and Reel", Manufacturer="On Semiconductor", ComponentLink1Description="Manufacturer URL", ComponentLink1URL=http://www.onsemi.com/, ComponentLink2Description=Datasheet, ComponentLink2URL=http://www.onsemi.com/pub_link/Collateral/MMSZ5221BT1-D.PDF, ComponentLink3Description="Package Specification", ComponentLink3URL=http://www.onsemi.com/pub_link/Collateral/425-04.PDF, DatasheetVersion="Rev. 12", Mounting Technology="Surface Mount", P Max (W)=0.5, PackageDescription="2-Pin SOD, Body 1.6 x 2.69 mm", PackageReference=SOD-123-2-425-04, PackageVersion="Rev. G, 10/2009", Packing="Tape and Reel", PartNumber=MMSZ5231BT1G, RoHS=Pb-Free, VZ Typ (V)=5.1
D2 D3: library part CMP-06195-000025-1, "TVS DIODE 4V 1005", Case Code (Imperial)=0402, Case Code (Metric)=1005, Max Operating Temperature=85°C, Min Operating Temperature=-40°C, Power Line Protection=No, Resistor Type=Zener, Reverse Standoff Voltage=4V, Case/Package=0402, Mount="Surface Mount", Number of Bidirectional Channels=1, Packaging="Tape and Reel"
J: "6 Position Card Connector Micro SIM Surface Mount, Right Angle Gold", Package=None, Availability=Unavailable, MF=Molex, MP=78646-3001, Price=None, SnapEDA_Link=https://www.snapeda.com/parts/78646-3001/Molex/view-part/75189/?ref=snap
J1 J2: library part CMP-2000-05152-3, "CONN U.FL RCPT STR 50 OHM SMD", Dielectric Material=Polymer, Frequency=6GHz, Housing Color=Beige, Insulation Resistance=500MR, Max Operating Temperature=90°C, Min Operating Temperature=-40°C, Package Quantity=2500, Body Material=Bronze, Body Plating=Silver, Connector Type=Coaxial, Contact Material=Brass, Contact Plating=Gold, Depth=3.1mm, Fastening Type=Snap, Gender=Male, Impedance=50R, Lead Free="Lead Free", Length=3mm, Max Frequency=6GHz, Mount="Surface Mount", Orientation=Straight, Packaging="Cut Tape", Radiation Hardening=No, REACH SVHC="No SVHC", Series=U.FL, Termination=Solder, Weight=0.001764oz, Wire/Cable Type=Coaxial
J3: library part CMP-17439-000024-1, "CONN HEADER SMD R/A 2POS 1MM", Color=Natural, Contact Resistance=40mR, Current Rating=700mA, Flammability Rating="UL94 V-0", Housing Color=Beige, Insulation Resistance=100MR, Max Current Rating=1A, Max Operating Temperature=85°C, Max Voltage Rating (AC)=50V, Min Operating Temperature=-25°C, Connector Type=Header, Contact Finish - Mating=TIN, Contact Material="Copper Alloy", Contact Plating=Copper, Contact Shape=Square, Contact Type="Male Pin", Depth=4.95mm, Fastening Type=Pull, Housing Material=Polyamide, Insulation Color=Natural, Insulation Material=Nylon, Lead Free="Lead Free", Lead Pitch=1mm, Length=4mm, Material=Polyamide, Mount="Surface Mount", Number of Contacts=2, Number of Positions=2, Number of Rows=1, Orientation="Right Angle", Packaging="Tape and Reel", Pitch=1mm, REACH SVHC="No SVHC", Series=SR, Termination=Solder, Voltage Rating=50V, Voltage Rating (AC)=50V
J4: library part CMP-2000-05246-2, "CONN RCPT USB2.0 MICRO B SMD R/A", Current Rating=1.8A, Manufacturer=Molex, Package=0, Temperature="-30°C to +85°C", Temperature Range High=+85°C, Temperature Range Low=-30°C, Voltage Rating=30V, Automotive=No, Category=Conn, ComponentLink2Description=Datasheet, ComponentLink2URL=https://www.molex.com/webdocs/datasheets/pdf/en-us/0473460001_IO_CONNECTORS.pdf, Conn Orientation="Right Angle", Contact Material=Gold,Nickel, Device Class L1=Connectors, Device Class L2="USB Connectors", Device Class L3=unset, Digikey Description="CONN RCPT USB2.0 MICRO B SMD R/A", Footprint Url=https://www.molex.com/pdm_docs/sd/473460001_sd.pdf, Height=2.945mm, Is Female=yes, Lead Free=Yes, Manufacturer Part Number=473460001, Number of Contacts=5, Octopart=https://octopart.com/47346-0001-molex-7164928, Pitch=0.65mm, RoHS=TRUE, Shielding=true, Usb Standard="USB 2.0"
MK1: "Microphone", LatestRevisionDate=17-Jul-2002, LatestRevisionNote="Re-released for DXP Platform.", PackageReference=PIN2, Published=24-Mar-1999, Publisher="Altium Limited"
P1: "Header, 15-Pin", LatestRevisionDate=17-Jul-2002, LatestRevisionNote="Re-released for DXP Platform.", Publisher="Altium Limited"
P2 P3: library part CMP-2000-07079-1, "SSR Connector, Pitch 1 mm, 1 x 4 Position, Height 2 mm, -20 to 85 degC, RoHS, Tape and Reel", Manufacturer=JST, Package Description="SSR Connector, Pitch 1 mm, 1 x 4 Position, Height 2 mm", Package Reference=SM04B-SSR-H-TB, Datasheet URL=http://www.jst-mfg.com/product/pdf/eng/eSSR.pdf, Datasheet Version=11/2010, Manufacturer URL=http://www.jst.com/home2.html, Mounting Technology=SurfaceMount, No of Positions=4, Pitch=1mm, Style/Orientation=Plug, Termination=IDC, Type=WiretoBoard
P4: library part "Header 2", "Header, 2-Pin", LatestRevisionDate=17-Jul-2002, LatestRevisionNote="Re-released for DXP Platform.", Publisher="Altium Limited"
Q1: library part CMP-2000-06251-1, "P-Channel Specified Power Trench(R) MOSFET, 2.5 V, -20 V, -1.6 A, -55 to 150 degC, 3-Pin SOT23, RoHS, Tape and Reel", Current - Continuous Drain (Id) @ 25°C=1.6A(Ta), Drain to Source Voltage (Vdss)=20V, Input Capacitance (Ciss) @ Vds=451pF@10V, Manufacturer="Fairchild Semiconductor", Package / Case=TO-236-3,SC-59,SOT-23-3, Package Description="3-Pin Small Outline Transistor, Body 2.92 x 1.4 mm, Pitch 0.95 mm", Package Reference=SSOT3L, Package Version="Rev. 3, 05/2015", Power - Max=460mW, Standard Package=3,000, Supplier Device Package=3-SSOT, Category=DiscreteSemiconductorProducts, Datasheet URL=https://datasheet.ciiva.com/22655/1802191-22655335.pdf, Datasheet Version="Rev. F1(W), 11/2013", Family=FETs-Single, FET Feature=Standard, FET Type=MOSFETP-Channel,MetalOxide, Gate Charge (Qg) @ Vgs=6.2nC@4.5V, Manufacturer URL=https://www.fairchildsemi.com/, Mounting Technology=SurfaceMount, Mounting Type=SurfaceMount, Online Catalog=P-ChannelLogicLevelGateFETs, Other Names=FDN338PTR, Package URL=https://www.fairchildsemi.com/package-drawings/MA/MA03B.pdf, Packaging=Tape&Reel(TR), PCN Design/Specification=MoldCompound08/April/2008, PCN Packaging=BinaryYearCodeMarking15/Jan/2014, Product Training Modules=HighVoltageSwitchesforPowerProcessingSMPSPowerSwitch, Rds On (Max) @ Id, Vgs=115mOhm@1.6A,4.5V, Series=PowerTrench®, Vgs(th) (Max) @ Id=1.5V@250µA
Q2 Q3 Q5 Q6: library part CMP-0630-00443-1, "Digital Transistor (BRT), R1=10 kOhm, R2=10 kOhm, NPN Transistor, 3-Pin SOT-723, Pb-Free, Tape and Reel", Manufacturer="On Semiconductor", ComponentLink1Description="Manufacturer URL", ComponentLink1URL=http://www.onsemi.com/, ComponentLink2Description=Datasheet, ComponentLink2URL=http://www.onsemi.cn/pub_link/Collateral/DTC114E-D.PDF, ComponentLink3Description="Package Specification", ComponentLink3URL=http://www.onsemi.com/pub_link/Collateral/631AA.PDF, DatasheetVersion="Rev. 5", hFE Min=35, IC Continuous (A)=0.1, Mounting Technology="Surface Mount", PackageDescription="3-Pin Small Outline Transistor, Body 1.2 x 0.8 mm, Pitch 0.4 mm", PackageReference=SOT-723-3-631AA-01, PackageVersion="Rev. D, 08/2009", Packing="Tape and Reel", PartNumber=DTC114EM3T5G, Polarity=NPN, R1/R2 Typ=1, RoHS=TRUE, V(BR)CEO Min (V)=50
R1 R2 R3 R4 R5 R6 R7 R8 R9 R10 R11 R12 R13 R14 R15 R16 R17 R18 R19 R20 R21 R22 R23 R24 R25 R26 R27 R28 R29 R30 R31 R32 R100: library part CMP-1011-00001-2, Manufacturer="Yageo / Phycomp", Part Number=RC0402JR-070RL
S1 S2 S3 S4 S5 S6 S7 S8 S9 S10 S11 S12 S13 S14 S15 S16: library part SW-SPST, "Single-Pole, Single-Throw Switch", LatestRevisionDate=17-Jul-2002, LatestRevisionNote="Re-released for DXP Platform.", PackageDescription="Switch; 2 Leads", PackageReference=SPST-2, Published=24-Mar-1999, Publisher="Altium Limited"
U: "Module: GSM/Bluetooth; GPRS; 2G; 1800MHz, 900MHz; 85.6kbps; SMD", Package=None, Availability=Unavailable, MF=Simcom, MP=SIM800C, Price=None, SnapEDA_Link=https://www.snapeda.com/parts/SIM800C/SIMcom%20Wireless%20solutions%20Co.%2CLtd/view-part/571323/?ref=snap
U1: library part CMP-1063-00205-1, "5-Line Transient Voltage Suppressor Array, 6-Pin SOT-563, Pb-Free, Tape and Reel", Manufacturer="On Semiconductor", C Max (pF)=70, ComponentLink1Description="Manufacturer URL", ComponentLink1URL=http://www.onsemi.com/, ComponentLink2Description=Datasheet, ComponentLink2URL=http://www.onsemi.com/pub_link/Collateral/NUP5120-D.PDF, ComponentLink3Description="Package Specification", ComponentLink3URL=http://www.onsemi.cn/pub_link/Collateral/463A-01.PDF, DatasheetVersion="Rev. 4", Direction=Unidirectional, IR Max (uA)=0.5, Mounting Technology="Surface Mount", Number of Lines=5, PackageDescription="6-Pin Small Outline Transistor, Body 1.6 x 1.2 mm, Pitch 0.5 mm", PackageReference=SOT-563-6-463A-01, PackageVersion="Rev. F, 04/2005", Packing="Tape and Reel", PartNumber=NUP5120X6T1G, PPK Max (W)=90, RoHS=Pb-Free, V(BR) Min (V)=6.2, VRWM Max (V)=5
U2: library part CMP-0057-00557-3, "1W Audio Power Amplifier, 8-pin Mini SOIC, Pb-Free", Manufacturer="Texas Instruments", PackageTopMarking=ZXTT*GA2, PowerWise=N, Code_JEDEC=MO-187-AA, ComponentLink1Description="Datasheet URL", ComponentLink1URL=http://www.ti.com/general/docs/lit/getliterature.tsp?genericPartNumber=LM4889&fileType=pdf, CompType="Audio IC", PackageDescription="MINI SOIC, .118 x .118 x .034in, 8 Lead, .0256in Pitch", PackageReference=DGK0008A, PinCount=8, RoHS=Y
U3 U10: library part CMP-0244-00328-2, "IC REG LINEAR 3.3V 150MA SOT23-5", Case/Package=SOT-23, Dropout Voltage=60mV, Input Bias Current=85uA, Max Input Voltage=6V, Max Operating Temperature=125°C, Max Output Current=150mA, Min Current Limit=300mA, Min Input Voltage=2.5V, Min Operating Temperature=-40°C, Min Output Voltage=3.3V, Output Voltage Accuracy=2%, Package Quantity=1, Quiescent Current=150uA, Accuracy=2%, Height=1.3mm, Lead Free="Lead Free", Length=3mm, Mount="Surface Mount", Number of Outputs=1, Number of Pins=5, Number of Regulators=1, Output Current=150mA, Output Type=Fixed, Output Voltage=3.3V, Packaging="Tape and Reel", Polarity=Positive, Radiation Hardening=No, Width=1.75mm
U4: library part CMP-0236-00182-2, "ARM Cortex-M3 32-bit MCU, 64 KB Flash, 32 KB Internal RAM, 37 I/Os, 48-Pin LQFP, -40 to 85 degC, Tray", I/Os (High Current)=37, Manufacturer=STMicroelectronics, Operating Frequency(F) (Processor speed) (MHz)=32, Package Description="48-Pin Low Profile Quad Flat Package, Body 7 x 7 mm, Pitch 0.5 mm", Package Reference=LQFP48, Supply Voltage(Vcc) min (V)=1.8, ComponentLink1Description="Manufacturer URL", ComponentLink1URL=http://www.st.com/, ComponentLink2Description=Datasheet, ComponentLink2URL=http://www.st.com/st-web-ui/static/active/en/resource/technical/document/datasheet/DM00078689.pdf, Core="ARM Cortex-M3", D/A Converter=2, Data E2PROM nom (B)=4096, DatasheetVersion="Rev. 4", FLASH Size (Prog) (kB)=64, Internal RAM Size (kB)=32, Mounting Technology="Surface Mount", Packing=Tray, PartNumber=STM32L151C8T6A
U6: library part Component_1
Y1: library part XTAL, "Crystal Oscillator", LatestRevisionDate=17-Jul-2002, LatestRevisionNote="Re-released for DXP Platform.", PackageDescription="Crystal, Thru-Hole; 2 Leads; Body 3.1 x 8.2 mm (Dia.xH)", PackageReference=R38, Published=8-Jun-2000, Publisher="Altium Limited"
C6: SimulationGenericComponent=True

## Via types
v1: diameter 0.4, hole 0.2, Top Layer to Bottom Layer (GND), tented both sides, 787 vias
v2: diameter 0.45, hole 0.198, Top Layer to Bottom Layer (GND), tented both sides, 9 vias

## Nets (pads, with @x,y where several pads share a name; then routed paths per layer and width w, separated by ;. In a path a pad name is that pad's centre, name@x,y a point inside that pad or via, vN(x,y) a via of type N, cw(c..) or ccw(c..) an arc to the next point about the centre after c; other vN are vias at no path point)
3V3: C12.2 C13.2 C38.2 C42.2 C43.2 C44.2 C45.2 P1.7 P3.1 R6.1 R7.2 R16.1 R27.2 U3.5 U4.1 U4.9 U4.24 U4.36 U4.48 | length 59.9
  Top Layer w0.254: R7.2@6.858,72.238 6.883,72.238 7.031,72.09 7.031,72.065 7.163,71.933 7.163,71.628 7.567,71.224 7.872,71.224 8.045,71.051 8.045,70.912 8.073,70.884 8.364,70.884 v1(8.687,70.561) U4.9@8.687,69.595 ; U4.1@12.656,69.4 12.656,68.754 12.677,68.732 14.177,68.732 ; U4.36@12.673,60.803 12.82,60.655 v1(13.259,60.655) ; U4.48@14.321,67.841 14.326,67.846 14.326,68.584 14.177,68.732 ; v1(14.457,69.037) 14.457,69.012 14.177,68.732 ; v1@14.606,69.068 17.221,69.068 ; v1(17.221,67.513) 17.221,69.068 ; P1.7@25.298,69.068 17.221,69.068
  Top Layer w0.305: R27.2@2.382,63.477 2.382,63.452 3.095,62.74 ; v1(3.353,65.07) 3.353,62.998 3.095,62.74 ; v1@4.985,61.682 4.872,61.57 4.265,61.57 3.095,62.74 ; U4.24@5.581,62.291 5.581,62.263 5.944,61.9 v1(5.944,61.874)
  Int2 w0.254: v1(3.353,65.07) 3.381,65.098 3.596,65.098 4.182,65.684 9.22,65.684 10.216,66.68 ; v1(8.687,70.561) 9.754,69.494 9.754,67.142 10.216,66.68 ; v1(13.734,68.275) 11.811,68.275 10.216,66.68 ; v1@14.021,61.103 14.021,61.721 14.224,61.924 14.224,63.652 12.541,65.336 11.666,65.336 10.322,66.68 10.216,66.68 ; v1(17.221,67.513) 17.221,66.334 17.374,66.181 v1(17.374,66.142)
  Bottom Layer (GND) w0.254: P3.1@12.081,60.07 13.778,60.07 13.926,60.218 13.926,60.917 v1(13.954,60.945) ; C38.2@12.344,65.797 C38.2@12.525,65.616 ; v1(13.259,60.655) 13.287,60.683 13.57,60.683 C42.2@13.695,60.808 ; v1(13.734,68.275) 13.734,68.315 v1(14.457,69.037)
  Bottom Layer (GND) w0.305: C43.2@5.177,61.743 5.29,61.856 5.925,61.856 v1(5.944,61.874) ; C38.2@12.525,65.616 C38.2@12.609,65.532
  Bottom Layer (GND) w0.508: U3.5@10.516,66.68 10.816,66.68 10.862,66.634 10.862,66.564 11.401,66.025 12.116,66.025 C38.2@12.344,65.797
  other v1: 5.029,61.701 12.525,65.321
3V3A: C36.1 C37.1 C102.2 U2.6 U10.5 | length 8.9
  Top Layer w0.254: U2.6@6.939,83.193 6.939,83.201 v1(6.941,83.203)
  Top Layer w0.508: U10.5@4.198,82.179 6.67,82.179 7.468,81.382 v1(7.468,80.467)
  Top Layer w0.6: C102.2@4.115,83.475 4.115,82.179 U10.5@4.198,82.179
  Bottom Layer (GND) w0.254: C36.1@6.941,82.89 v1(6.941,83.203)
  Bottom Layer (GND) w0.6: C36.1@6.941,82.89 7.301,82.53 7.301,81.279 7.401,81.179 7.401,80.534 v1(7.468,80.467)
AUDIO_SHUTD: R15.2 U2.1 U4.12 | length 12.4
  Top Layer w0.254: R15.2@4.267,79.368 4.387,79.248 5.267,79.248 5.365,79.15 5.365,78.593 4.712,77.94 4.712,72.098 6.824,69.986 7.135,69.986 7.156,69.964 U4.12@7.156,69.4
DCD: R23.1 U.5 | length 20.3
  Top Layer w0.254: R23.1@15.545,57.423 v1(15.545,57.81) ; v1(29.323,57.018) 29.323,61.506 v1@29.539,61.722
  Int2 w0.254: v1(15.545,57.81) 15.573,57.838 16.053,57.838 18.113,55.778 28.084,55.778 28.804,56.498 v1(29.323,57.018)
  other v1: 29.566,61.722
DTR: R21.2 R26.1 R32.2 U.6 | length 30.8
  Top Layer w0.254: R21.2@14.478,57.423 v1(14.478,58.369) ; v1(28.34,57.002) 28.34,61.471 v1(28.439,61.57) ; v1(28.499,62.332) 29.413,63.246 35.052,63.246 35.943,62.355 37.045,62.355 37.065,62.335 R26.1@37.065,61.265
  Int2 w0.254: v1(14.478,58.369) 16.612,58.369 18.44,56.54 27.879,56.54 v1(28.34,57.002)